# Altium PCB LPKF_ISEN_MAXSIZE_22-05-2017.PCBDOC
Units mm, origin at the board's own origin, x right, y up, seen from the top; angles counter-clockwise.
Board outline 299.72 x 199.9 mm, 2 copper layers (Top Layer, Bottom Layer); 5 components, 4 nets, 45 pads, 0 vias.
Unrouted connection lines stored in the file: 1.
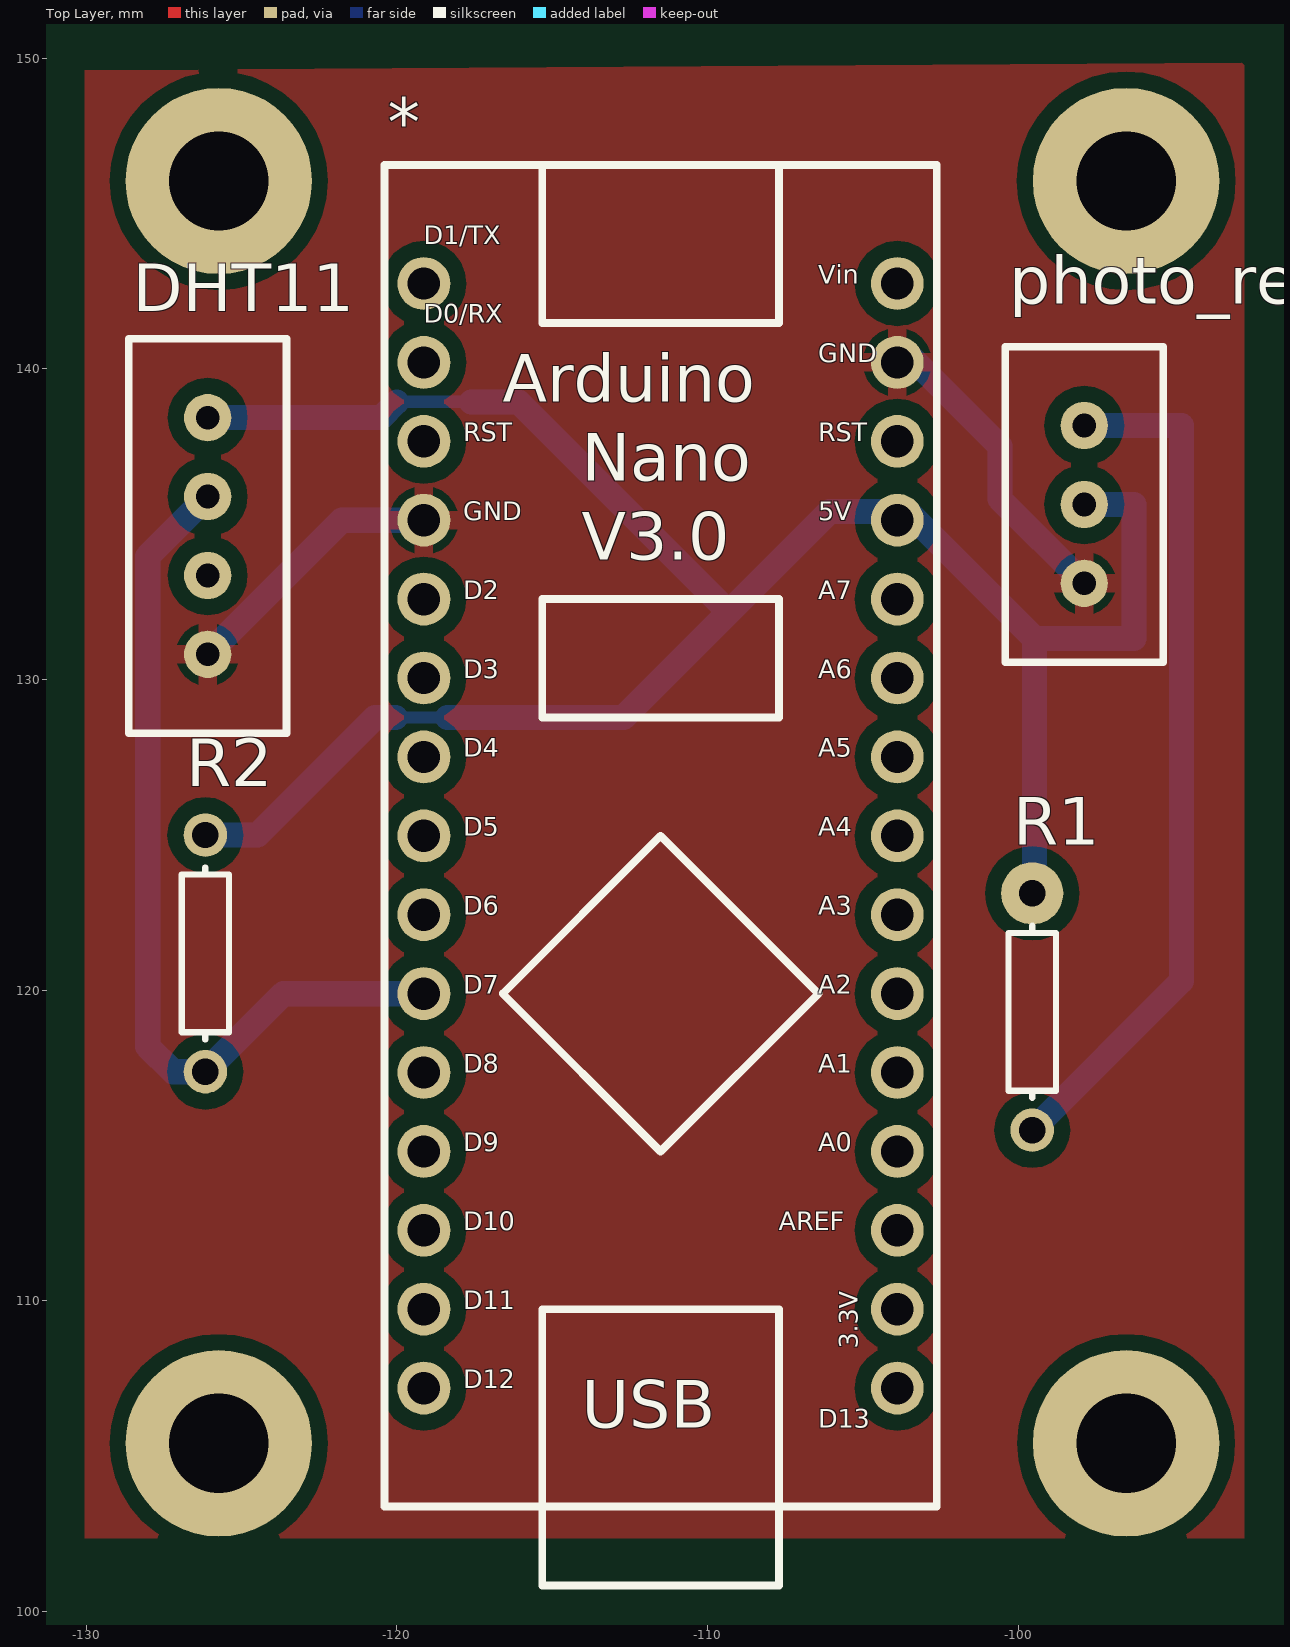
[diagram p0: Top Layer view]
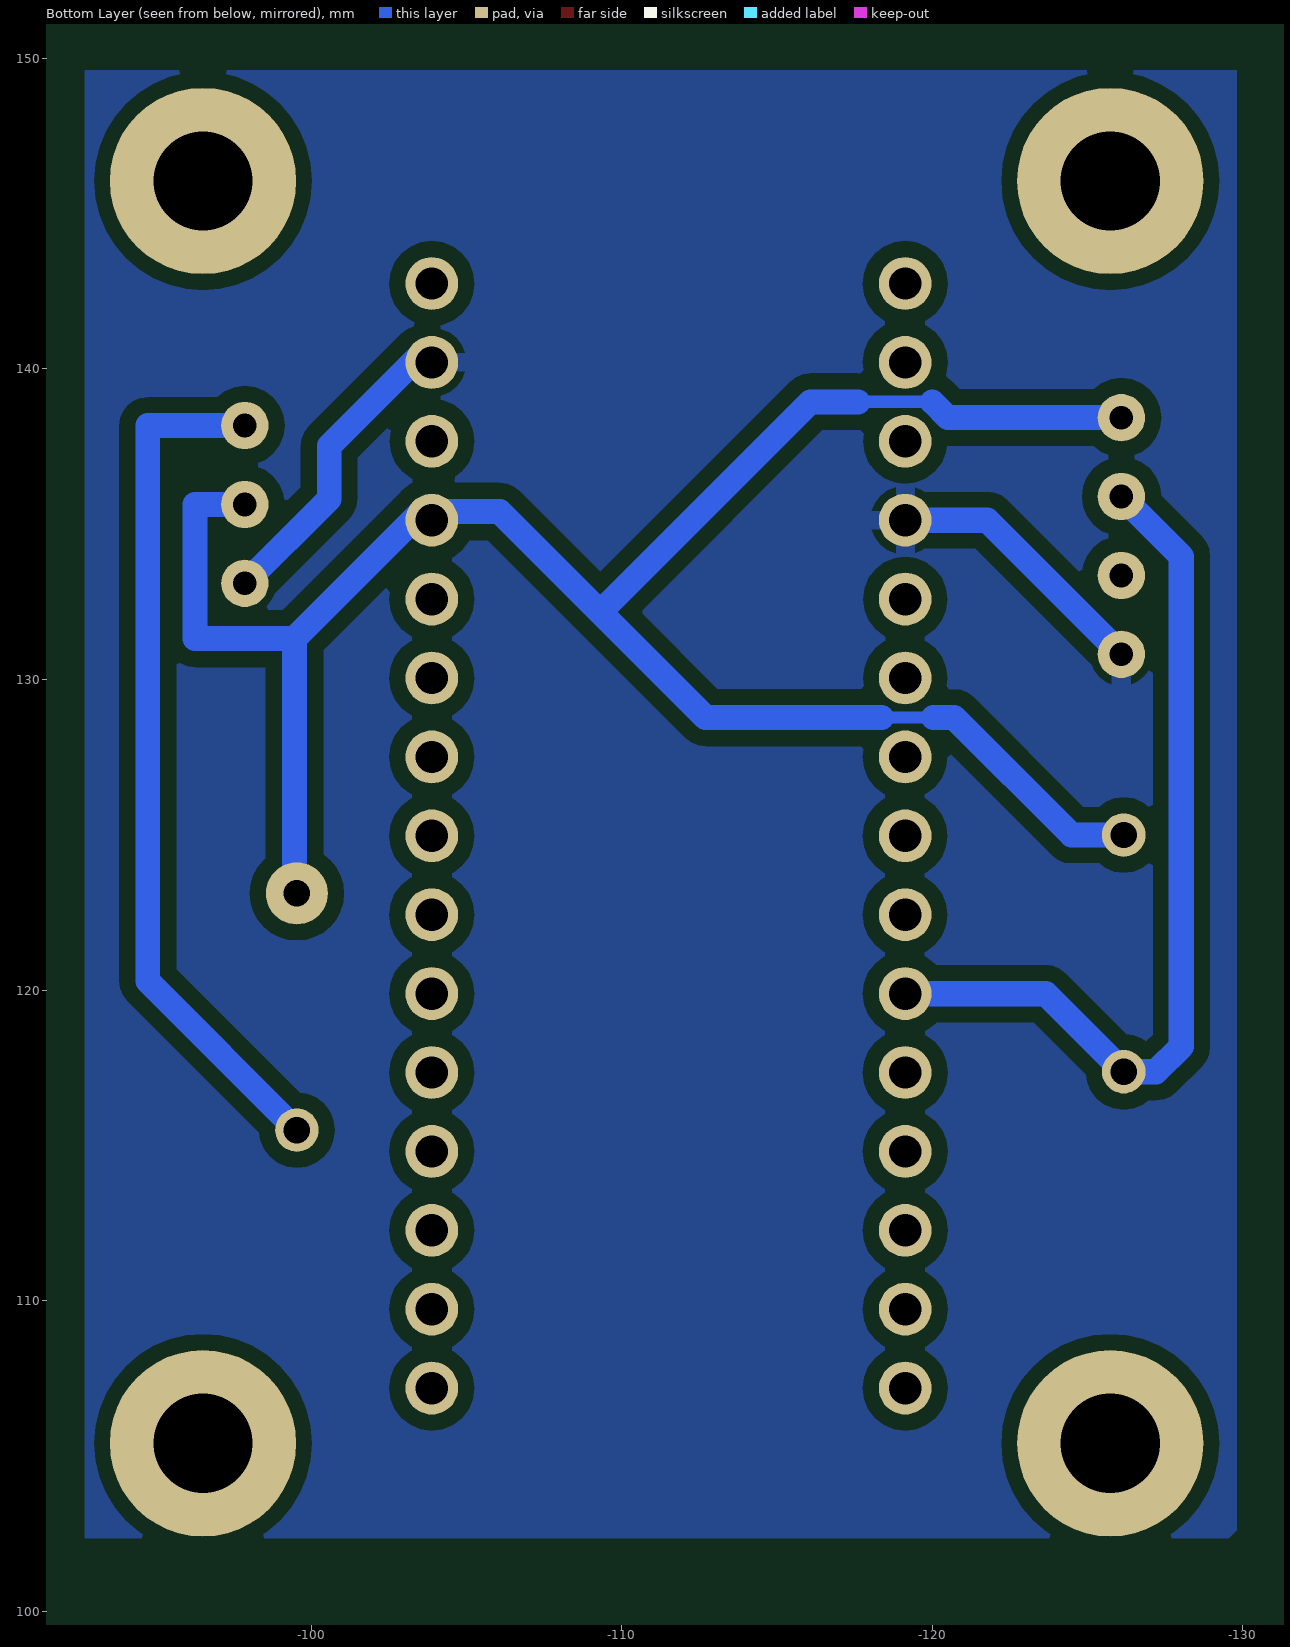
[diagram p1: Bottom Layer view, seen from below]

## Layer stack, top to bottom
Top Solder: solder mask 0.0102, Solder Resist, Dk 3.5
Top Layer: signal copper 0.0356
Dielectric1: dielectric 0.32, FR-4, Dk 4.8
Bottom Layer: signal copper 0.0356
Bottom Solder: solder mask 0.0102, Solder Resist, Dk 3.5

## Board outline
-141.655,-46.39 158.065,-46.39 158.065,153.508 -141.655,153.508

## Design rules (kind name [scope] priority, off if disabled: settings)
Clearance Clearance_bottom_polygon [OnLayer('Bottom Layer') Or OnLayer('Multi-Layer') vs OnLayer('Bottom Layer')  And  InPoly] p1: gap=0.508
Clearance Clearance_top_polygon [OnLayer('Top Layer')  Or OnLayer('Multi-Layer') vs OnLayer('Top Layer') And InPoly] p2: gap=0.508
Clearance Clearance_bottom [OnLayer('Bottom Layer') Or OnLayer('Multi-Layer') vs OnLayer('Bottom Layer')  And Not InPoly] p3: gap=0.203
Clearance Clearance_top [OnLayer('Top Layer')  Or OnLayer('Multi-Layer') vs OnLayer('Top Layer') And Not InPoly] p4: gap=0.203
Clearance Clearance_pad_to_pad [OnLayer('Multi-Layer') vs OnLayer('Multi-Layer')] p5: gap=0.254
ComponentClearance ComponentClearance_bottom [OnLayer('Bottom Overlay') vs OnLayer('Bottom Overlay')] p1: gap=0 collisioncheckmode=3 verticalgap=0.254 showdistances=FALSE
ComponentClearance ComponentClearance_top [OnLayer('Top Overlay') vs OnLayer('Top Overlay')] p2: gap=0 collisioncheckmode=3 verticalgap=0.254 showdistances=FALSE
FabricationTestPointUsage TestPointUsage [All] p1: valid=0 allowmultiple=FALSE
FabricationTestpoint Testpoint [All] p1: side=3 testpointundercomponent=TRUE minsize=1.016 maxsize=2.54 preferedsize=1.524 minholesize=0 maxholesize=1.016 preferedholesize=0.813 testpointgrid=0.025 allowsidetop=TRUE allowsidebottom=TRUE usegrid=TRUE gridtolerance=0
HoleSize [All] p1: absolutevalues=TRUE maxlimit=25.4 minlimit=0.406 maxpercent=80.000 minpercent=20.000
MinimumAnnularRing [PadXSize_AllLayers = PadYSize_AllLayers] p1: minimumring=0.254
PermittedLayers [All] p1: toplayerpermitted=TRUE bottomlayerpermitted=TRUE
PolygonConnect [All] p1: connectstyle=Relief reliefconductorwidth=0.61 reliefentries=4 polygonreliefangle="90 Angle" airgapwidth=0.254
RoomDefinition shemat [InComponentClass('shemat')] p1: confinementstyle=ConfineIn formatcopy=TRUE lockcomponents=FALSE outline -192.455,-122.59 -141.655,-122.59 -141.655,-97.19 -192.455,-97.19
RoutingVias [All] p1: holewidth=0.406 width=0.914 viastyle="Through Hole" minholewidth=0.406 minwidth=0.914 maxholewidth=25.4 maxwidth=25.4
SMDToPlane [All] p1: distance=0
SolderMaskExpansion [All] p1: expansion=0.102
ViasUnderSMD [All] p1: allowed=FALSE
Width Width_botom_top [OnLayer('Bottom Layer') or OnLayer('Top Layer')] p1: maxlimit=254 minlimit=0.254 preferedwidth=0.813
26 further rules are at their usual default settings.

## Components (designator, comment, footprint, x,y, rotation, side; value= is the part's Value field where it differs from the comment)
* "Arduino Nano" "Arduino Nano FootPrint" -111.506,127.508 r0 top
DHT11 "sensor humidity & température" DHT11 1118.514,-1112.52 r270 top
photo_resitor "" photo_resitor 1134.033,-1100.074 r270 top
R1 "Res1" AXIAL-0.3#1 -99.543,119.304 r270 top
R2 "Res1" AXIAL-0.3#2 -126.162,121.183 r90 top

## Footprints (in the part's own frame and the unit in brackets; to place one, negate y for a bottom-side part, rotate by r counter-clockwise, add the part's x,y. Pads: shape width x height; smd on the part's side, far side on the other; paste and mask are expansions set on the pad)
"Arduino Nano FootPrint" [mm]
  round 1.7 hole 1.04: 1(-7.62,15.24) 2(-7.62,12.7) 3(-7.62,10.16) 4(-7.62,7.62) 5(-7.62,5.08) 6(-7.62,2.54) 7(-7.62,0) 8(-7.62,-2.54) 9(-7.62,-5.08) 10(-7.62,-7.62) 11(-7.62,-10.16) 12(-7.62,-12.7) 13(-7.62,-15.24) 14(-7.62,-17.78) 15(-7.62,-20.32) 16(7.62,-20.32) 17(7.62,-17.78) 18(7.62,-15.24) 19(7.62,-12.7) 20(7.62,-10.16) 21(7.62,-7.62) 22(7.62,-5.08) 23(7.62,-2.54) 24(7.62,0) 25(7.62,2.54) 26(7.62,5.08) 27(7.62,7.62) 28(7.62,10.16) 29(7.62,12.7) 30(7.62,15.24)
  silkscreen extent -8.89,-26.67 8.89,19.05
AXIAL-0.3#1 [mm] "Axial Device, Thru-Hole; 2 Leads; 0.3 in Pin Spacing"
  round 2 hole 0.85: 1(-3.81,0)
  round 1.4 hole 0.85: 2(3.81,0)
  silkscreen extent -2.77,-0.76 2.77,0.76
AXIAL-0.3#2 [mm] "Axial Device, Thru-Hole; 2 Leads; 0.3 in Pin Spacing"
  round 1.4 hole 0.85: 1(-3.81,0) 2(3.81,0)
  silkscreen extent -2.77,-0.76 2.77,0.76
DHT11 [mil] "humidity & temperature sensor"
  round 60 hole 30: Data(-49150,-49000) GND(-48950,-49000) "pin 3"(-49050,-49000) VCC(-49250,-49000)
  silkscreen extent -49350,-49100 -48850,-48900
photo_resitor [mil] "photo resistance with resistor"
  round 60 hole 30: Data(-48750,-48500) GND(-48550,-48500) VCC(-48650,-48500)
  silkscreen extent -48850,-48600 -48450,-48400

## Part data
DHT11: library part DHT11
photo_resitor: library part photo_resistor
R1 R2: "Resistor"

## Free pads (board coordinates)
  round 6 hole 3.2: 0(-125.73,146.05) 1(-96.52,146.05) 2(-96.52,105.41) 3(-125.73,105.41)

## Nets (pads, with @x,y where several pads share a name; then routed paths per layer and width w, separated by ;. In a path a pad name is that pad's centre, name@x,y a point inside that pad or via, vN(x,y) a via of type N, cw(c..) or ccw(c..) an arc to the next point about the centre after c; other vN are vias at no path point)
GND: *.4 *.29 DHT11.GND photo_resitor.GND | length 18.2
  Bottom Layer w0.8: *.29@-103.556,140.487 -100.584,137.516 -100.584,135.813 photo_resitor.GND
  Bottom Layer w0.813: DHT11.GND -121.768,135.128 *.4@-119.38,135.128
Net*_10: *.10 DHT11.Data R2.1 | length 28.8
  Bottom Layer w0.813: DHT11.Data -128.016,133.96 -128.016,118.186 -127.203,117.373 R2.1 -123.647,119.888 *.10
Net*_25: *.25 photo_resitor.Data R1.2 | length 27.8
  Bottom Layer w0.8: R1.2 -94.742,120.294 -94.742,138.176 photo_resitor.Data
VCC: *.27 DHT11.VCC photo_resitor.VCC R1.1 R2.2 | length 69.7
  Bottom Layer w0.4: -120.04,128.778 -118.364,128.778 ; -119.999,138.938 -117.602,138.938
  Bottom Layer w0.8: R2.2 -124.485,124.993 -120.701,128.778 -120.04,128.778 ; DHT11.VCC -120.507,138.43 -119.999,138.938 ; -117.602,138.938 -116.078,138.938 -109.398,132.258
  Bottom Layer w0.813: -118.364,128.778 -112.7,128.778 -106.07,135.407 -103.556,135.407 -99.466,131.318 ; R1.1 -99.466,123.19 -99.466,131.318 ; photo_resitor.VCC -96.266,135.636 -96.266,131.318 -99.466,131.318
pads on no net: "DHT11.pin 3" *.1 *.2 *.3 *.5 *.6 *.7 *.8 *.9 *.11 *.12 *.13 *.14 *.15 *.16 *.17 *.18 *.19 *.20 *.21 *.22 *.23 *.24 *.26 *.28 *.30

## Polygon pours and split planes (outlines as drawn)
GND on Top Layer "Top Layer-gnd" (solid, pour order 4): -130.048,149.606 -130.048,102.362 -92.71,102.362 -92.71,149.86
GND on Bottom Layer "Bottom Layer-gnd" (solid, pour order 9): -129.794,149.606 -129.794,102.616 -129.54,102.362 -92.71,102.362 -92.71,149.606

## Silkscreen, mask and mechanical layers (free items; w line width, h text height)
Mechanical 1:
  lines w0.1: -130.048,102.108 -130.048,149.606 -129.54,149.606 -92.71,149.606 -92.71,136.335 -92.71,114.872 -92.71,102.108 -130.048,102.108

## Text inside footprints (layer, text, board x,y; h text height)
*: Top Overlay "D12" at -117.856,107.188 h0.6; Top Overlay "D11" at -117.856,109.728 h0.6; Top Overlay "D10" at -117.856,112.268 h0.6; Top Overlay "D9" at -117.856,114.808 h0.6; Top Overlay "D8" at -117.856,117.348 h0.6; Top Overlay "D7" at -117.856,119.888 h0.6; Top Overlay "D6" at -117.856,122.428 h0.6; Top Overlay "D5" at -117.856,124.968 h0.6; Top Overlay "D4" at -117.856,127.508 h0.6; Top Overlay "D3" at -117.856,130.048 h0.6; Top Overlay "D2" at -117.856,132.588 h0.6; Top Overlay "GND" at -117.856,135.128 h0.6; Top Overlay "RST" at -117.856,137.668 h0.6; Top Overlay "D0/RX" at -119.126,141.478 h0.6; Top Overlay "D1/TX" at -119.126,144.018 h0.6; Top Overlay "D13" at -106.426,105.918 h0.6; Top Overlay "3.3V" at -105.156,108.458 h0.6 r90; Top Overlay "AREF" at -107.696,112.268 h0.6; Top Overlay "5V" at -106.426,135.128 h0.6; Top Overlay "RST" at -106.426,137.668 h0.6; Top Overlay "GND" at -106.426,140.208 h0.6; Top Overlay "Vin" at -106.426,142.748 h0.6; Top Overlay "A0" at -106.426,114.808 h0.6; Top Overlay "A1" at -106.426,117.348 h0.6; Top Overlay "A2" at -106.426,119.888 h0.6; Top Overlay "A3" at -106.426,122.428 h0.6; Top Overlay "A4" at -106.426,124.968 h0.6; Top Overlay "A5" at -106.426,127.508 h0.6; Top Overlay "A6" at -106.426,130.048 h0.6; Top Overlay "A7" at -106.426,132.588 h0.6; Top Overlay "V3.0" at -114.046,133.858 h1.52; Top Overlay "Nano" at -114.046,136.398 h1.52; Top Overlay "Arduino" at -116.586,138.938 h1.52; Top Overlay "USB" at -114.046,105.918 h1.52